# Altium PCB PCB2.PcbDoc
Units mil, origin at the board's own origin, x right, y up, seen from the top; angles counter-clockwise.
Board outline 1925 x 1700 mil, 2 copper layers (Top Layer, Bottom Layer); 20 components, 20 nets, 99 pads, 7 vias.
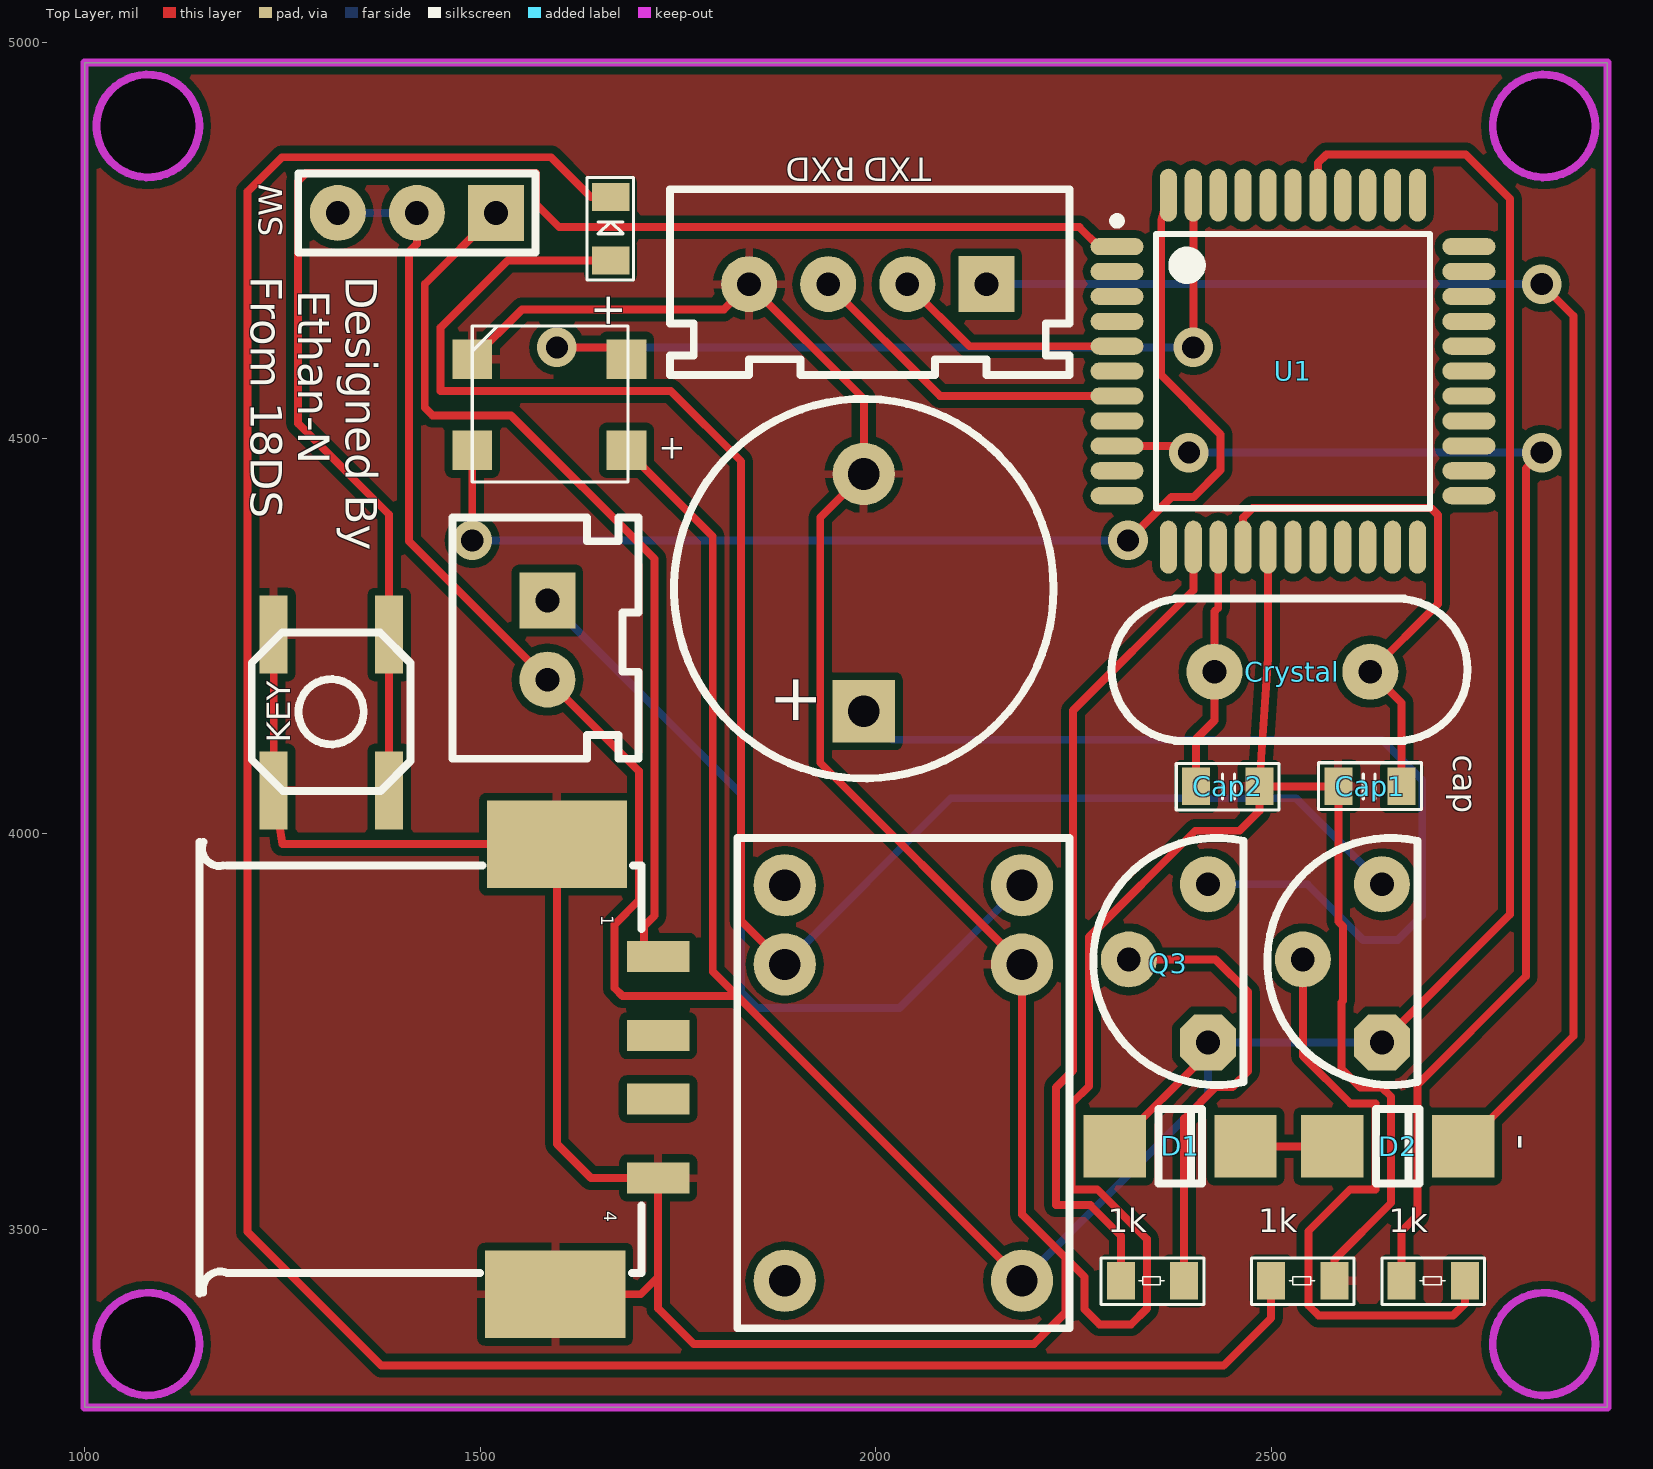
[diagram p0: Top Layer view]
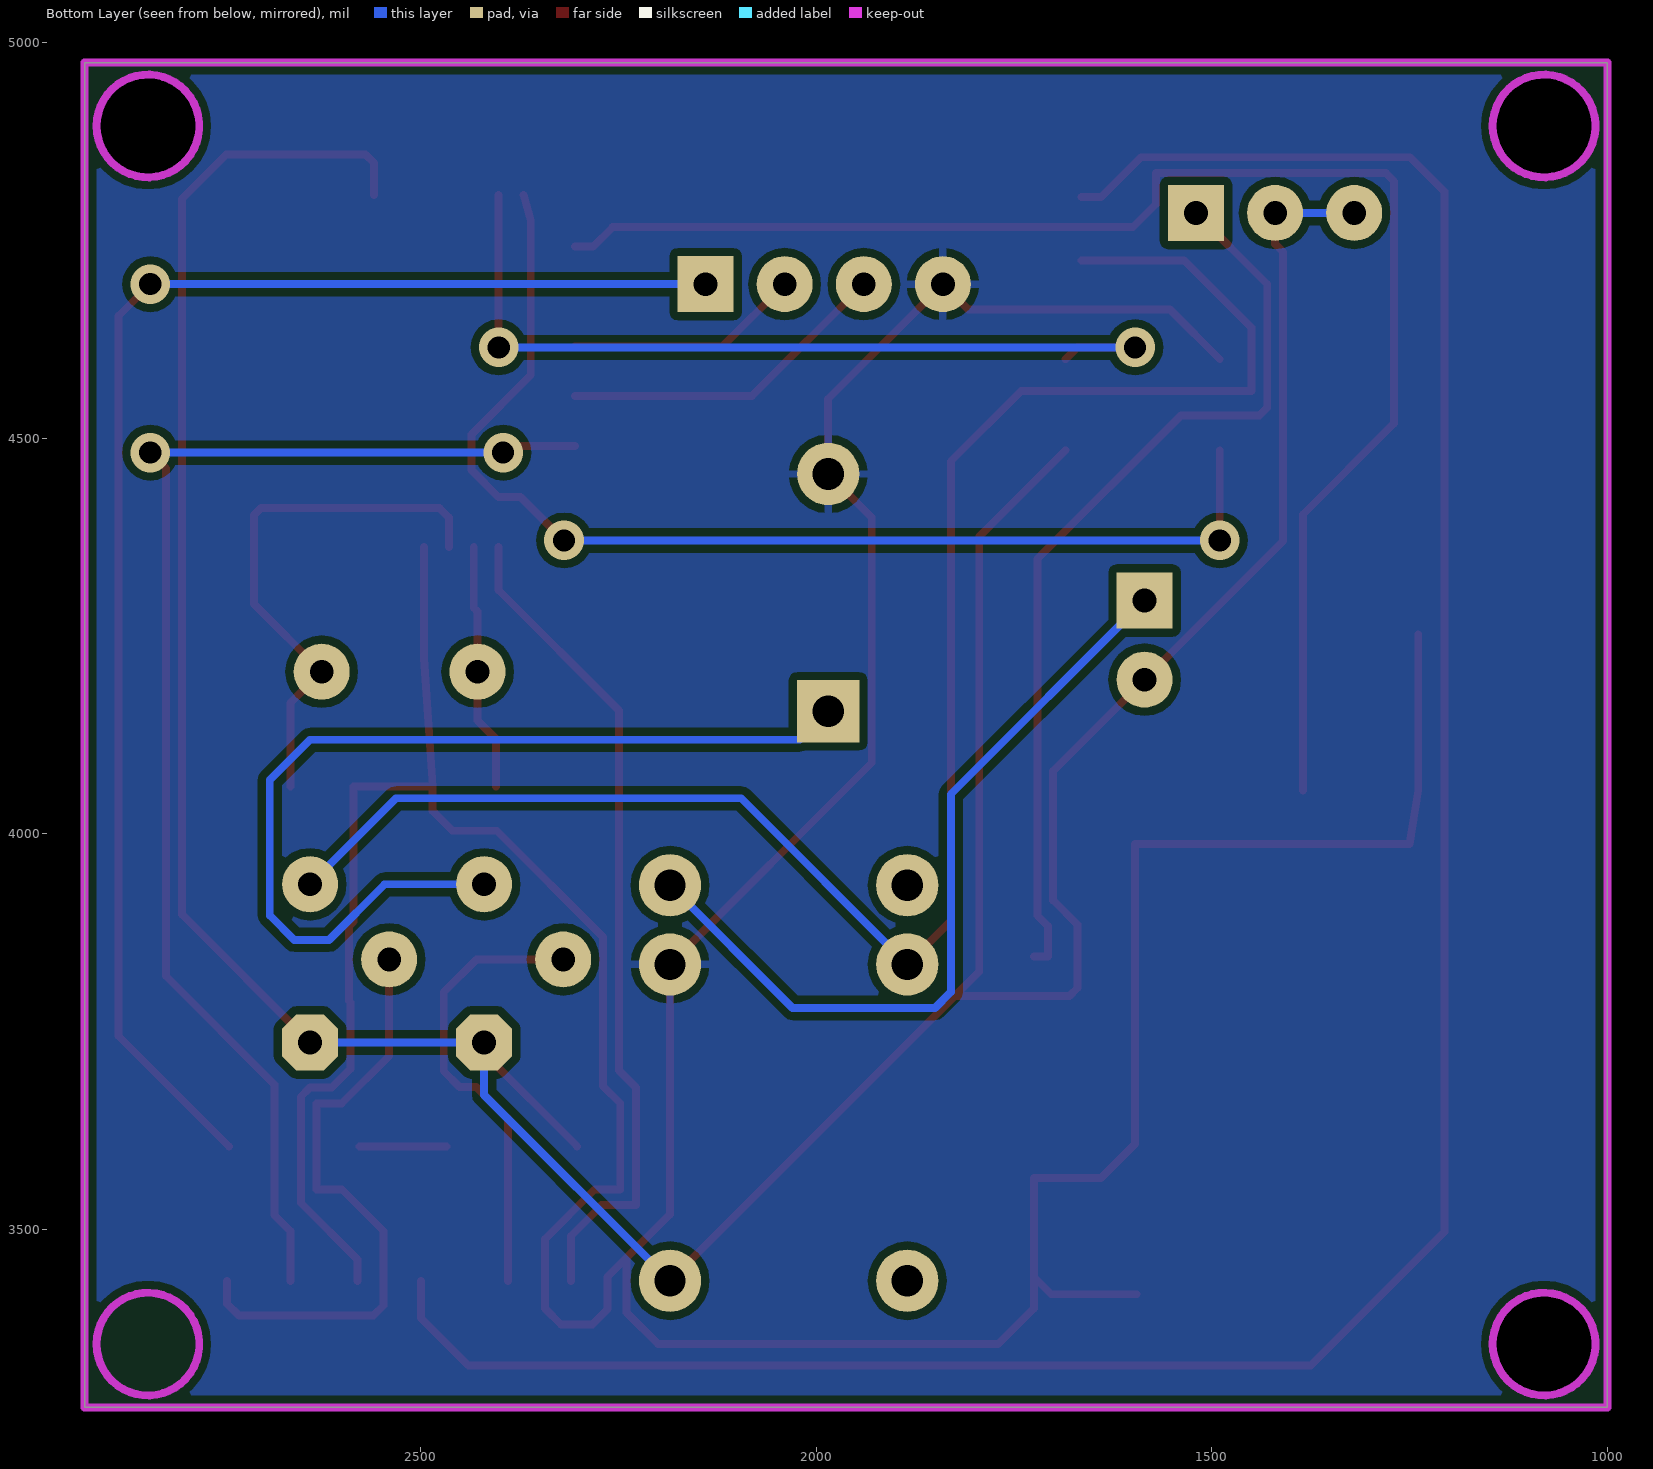
[diagram p1: Bottom Layer view, seen from below]

## Layer stack, top to bottom
Top Solder: solder mask 0.4, Solder Resist, Dk 3.5
Top Layer: signal copper 1.4
Dielectric 1: dielectric 12.6, FR-4, Dk 4.8
Bottom Layer: signal copper 1.4
Bottom Solder: solder mask 0.4, Solder Resist, Dk 3.5

## Board outline
1000,3275 1000,4975 2925,4975 2925,3275
cut-out: 2845,4830.04 cw(c2845,4895) 2780.04,4895 cw(c2845,4895) 2845,4959.96 cw(c2845,4895) 2909.96,4895 cw(c2845,4895)
cut-out: 1080,3290.04 cw(c1080,3355) 1015.04,3355 cw(c1080,3355) 1080,3419.96 cw(c1080,3355) 1144.96,3355 cw(c1080,3355)
cut-out: 1080,4830.04 cw(c1080,4895) 1015.04,4895 cw(c1080,4895) 1080,4959.96 cw(c1080,4895) 1144.96,4895 cw(c1080,4895)

## Design rules (kind name [scope] priority, off if disabled: settings)
Clearance [All] p1: gap=10 ignorepadtopadclearanceinfootprint=FALSE except(0: Arc-Hole Track-Hole SMDPad-Hole THPad-Hole Via-Hole Fill-Hole Poly-Hole Region-Hole Text-Hole)
PolygonConnect [All] p1: connectstyle=Relief reliefconductorwidth=10 reliefentries=4 polygonreliefangle="90 Angle" airgapwidth=10
RoomDefinition AS608-small [InComponentClass('AS608-small')] p1: confinementstyle=ConfineIn formatcopy=TRUE lockcomponents=FALSE outline 0,0 2000,0 2000,1000 0,1000
RoutingVias [All] p1: holewidth=28 width=50 viastyle="Through Hole" minholewidth=28 minwidth=50 maxholewidth=28 maxwidth=50
SolderMaskExpansion [All] p1: expansion=4
Width [All] p1: maxlimit=10 minlimit=10 preferedwidth=10
30 further rules are at their usual default settings.

## Classes and differential pairs
component class AS608-small: 1k Cap1 Cap2 Crystal D1 D2 KEY Q1 Q2 Q3 R2 R? SW U1 U2 U3 U4 ""

## Components (designator, comment, footprint, x,y, rotation, side; value= is the part's Value field where it differs from the comment)
1k "1K" 0805R 2285,3405 r0 top (schematic designator R?)
1k "1K" 0805R 2640,3405 r0 top (schematic designator R2)
1k "1K" 0805R 2475,3405 r0 top (schematic designator R1)
Cap1 "30PF" 0805C 2690,4090 r180 top
Cap2 "30PF" 0805C 2380,4030 r0 top
Crystal "11.0592MHZ" XTAL 2625,4205 r180 top
D1 "1N4007" SMA(DO-214AC)_S3 2385,3605 r180 top
D2 "1N4007" SMA(DO-214AC)_S3 2660,3605 r180 top
D3 "LED-YELLOW" 0805D 1635,4830 r270 top
K "继电器HK4100F" HK4100F 2245,3375 r90 top
KEY "功能按键" SW5*5 1412,4054 r90 top (schematic designator KEY?)
Q1 "S8550" 三极管 2690.04,3676.3 r90 top
Q2 "蜂鸣器" 蜂鸣器 1985.35,4155.34 r90 top
Q3 "S8550" 三极管 2470.02,3676.3 r90 top
SW "双掷开关" SS12D07G5 1575,4840 r180 top
U1 "STC89CXX" LQFP44 2259.56,4320 r0 top
U2 "AS608" XH4P 2250,4820 r180 top
U3 "接线柱" XH2P 1460,4405 r270 top
U4 "USB-A" USB-A贴片 1145,3990 r270 top
U5 "RGB" WS2812RGB 1490,4445 r0 top

## Footprints (in the part's own frame and the unit in brackets; to place one, negate y for a bottom-side part, rotate by r counter-clockwise, add the part's x,y. Pads: shape width x height; smd on the part's side, far side on the other; paste and mask are expansions set on the pad)
0805C [mm]
  rect 0.9x1.2 smd: 1(2.667,0.762) 2(0.635,0.762)
  silkscreen extent 0,0 3.3,1.5
0805D [mm]
  rect 0.9x1.2 smd: 1(2.667,0.762) 2(0.635,0.762)
  silkscreen extent 0,0 3.3,1.5
0805R [mm]
  rect 0.9x1.2 smd: 1(2.667,0.762) 2(0.635,0.762)
  silkscreen extent 0,0 3.3,1.5
HK4100F [mm]
  round 2 hole 1: 1(1.524,9.144) 2(11.684,9.144) 3(14.224,9.144) 4(14.224,1.524) 5(11.684,1.524) 6(1.524,1.524)
  silkscreen extent 0,0 15.75,10.67
LQFP44 [mm]
  oval 1.7x0.55 smd: 1(1.157,10.731) 2(1.157,9.931) 3(1.157,9.131) 4(1.157,8.331) 5(1.157,7.531) 6(1.157,6.731) 7(1.157,5.931) 8(1.157,5.131) 9(1.157,4.331) 10(1.157,3.531) 11(1.157,2.731) 23(12.457,2.731) 24(12.457,3.531) 25(12.457,4.331) 26(12.457,5.131) 27(12.457,5.931) 28(12.457,6.731) 29(12.457,7.531) 30(12.457,8.331) 31(12.457,9.131) 32(12.457,9.931) 33(12.457,10.731)
  oval 0.55x1.7 smd: 12(2.807,1.081) 13(3.607,1.081) 14(4.407,1.081) 15(5.207,1.081) 16(6.007,1.081) 17(6.807,1.081) 18(7.607,1.081) 19(8.407,1.081) 20(9.207,1.081) 21(10.007,1.081) 22(10.807,1.081) 34(10.807,12.381) 35(10.007,12.381) 36(9.207,12.381) 37(8.407,12.381) 38(7.607,12.381) 39(6.807,12.381) 40(6.007,12.381) 41(5.207,12.381) 42(4.407,12.381) 43(3.607,12.381) 44(2.807,12.381)
  silkscreen extent 1.03,2.33 11.21,11.68, body extent 1.81,1.73 11.81,11.73, height 1.2
SMA(DO-214AC)_S3 [mm]
  rect 2x2 smd: 1(2.1,0) 2(-2.1,0)
  silkscreen extent -0.7,-1.2 0.7,1.2
SS12D07G5 [mil]
  rect 70.87x70.87 hole 30: 1(55,55)
  round 70.87 hole 30: 2(155,55) 2(255,55)
  silkscreen extent 5,5 305,105
SW5*5 [mil]
  rect 98.43x35.43 smd: 1(1,173) 1(198,173) 2(1,27) 2(198,27)
  silkscreen extent 0,0 201,201
USB-A贴片 [mm]
  rect 1x2 smd: 1(3.683,14.732) 2(6.223,14.732) 3(8.255,14.732) 4(10.795,14.732)
  rect 2.8x4.5 smd: 5(0.076,11.481) 5(14.529,11.43)
  silkscreen extent 0,0 14.5,14.2
WS2812RGB [mil]
  rect 50x50 smd: 1(0,155) 2(0,40) 3(195,40) 4(195,155)
  silkscreen extent 0,0 197,197
XH2P [mil]
  rect 70.87x70.87 hole 30: 1(110,125)
  round 70.87 hole 30: 2(210,125)
  silkscreen extent 5,5 310,240
XH4P [mil]
  rect 70.87x70.87 hole 30: 1(110,125)
  round 70.87 hole 30: 2(210,125) 3(310,125) 4(410,125)
  silkscreen extent 5,5 510,240
XTAL [mm]
  round 1.8 hole 0.76: 1(-0.008,-0.001) 2(4.996,-0.001)
  silkscreen extent -3.13,-2.35 8.3,2.22
三极管 [mil]
  oct 70.87x70.87 hole 30: 1(60,50)
  round 70.87 hole 30: 2(165,150) 3(260,50)
  silkscreen extent 6,5 319,195
蜂鸣器 [mm]
  rect 2x2 hole 1.016: 1(-0.009,0.009)
  round 2 hole 1.016: 2(7.611,0.009)
  silkscreen extent -2.17,-6.09 10.02,6.1

## Part data
1k 1k 1k: library part RES
Cap1 Cap2: library part 瓷片电容
Crystal: library part XTAL
KEY: library part 微动开关
U5: library part WS2812RGB

## Via types
v1: diameter 50, hole 28, Top Layer to Bottom Layer, 7 vias

## Nets (pads, with @x,y where several pads share a name; then routed paths per layer and width w, separated by ;. In a path a pad name is that pad's centre, name@x,y a point inside that pad or via, vN(x,y) a via of type N, cw(c..) or ccw(c..) an arc to the next point about the centre after c; other vN are vias at no path point)
GND: 1k.1@2580,3435 Cap1.1 Cap2.1 K.5 KEY.1 Q2.2 U1.16 U2.4 U4.4 U4.5 U5.1 | length 6014.8
  Top Layer w10: KEY.1@1239,4252 1239,4055 1250,3987 1597,3987 1597,3608 1640,3565 U4.4 1725,3440 ; U5.1 1553.04,4663.04 1808.04,4663.04 U2.4 1985,4550 Q2.2 1930,4400 1930,4090 K.5 2185,3519 2240,3464 ; U4.5@1595,3418 1703,3418 1725,3440 ; U1.16 2496.06,4222.06 Cap2.1 ; 1k.1@2580,3435 2580,3462 2651.69,3533.69 2651.69,3667.68 2640,3679.37 2612.63,3679.37 2589,3703 2589,3787 2591,3789 2591,3883 2585,3889 Cap1.1 Cap2.1 ; 1725,3440 1725,3400 1770,3355 2200,3355 2240,3395 2240,3464 ; 2240,3464 2264,3440 2264,3399 2283,3380 2323,3380 2343,3400 2343,3487.63 2280,3550.63 2247.95,3550.63 2247.95,3659.37 2269.59,3681.01 2269.59,3869.59 2404,4004 2460,4004 2485,4029 Cap2.1
NetCap1_2: Cap1.2 Crystal.1 U1.15 | length 687.5
  Top Layer w10: U1.15 2464.57,4400 2476.57,4412 2702,4412 2711,4403 2711,4290.71 Crystal.1 2665,4165.34 Cap1.2
NetCap2_2: Cap2.2 Crystal.2 U1.14 | length 314.2
  Top Layer w10: Cap2.2 2405,4120 2428.32,4143.32 Crystal.2 2428.32,4281 2433.07,4285.75 U1.14
NetD1_2: D1.2 D2.1 | length 109.6
  Top Layer w10: D1.2 D2.1
NetD2_2: D2.2 U2.1 | length 1866.3
  Top Layer w10: D2.2 2882,3744.32 2882,4655 v1(2842,4695)
  Bottom Layer w10: U2.1 v1(2842,4695)
NetD3_1: D3.1 K.2 Q1.3 | length 2292.9
  Top Layer w10: D3.1 1535,4725 1450,4640 1450,4560 1741,4560 1830,4471 1830,3890 K.2
  Bottom Layer w10: K.2 2095,4045 2531.34,4045 Q1.3
NetD3_2: 1k.2@2500,3435 D3.2 | length 3248.7
  Top Layer w10: D3.2 1640,4805 1589.57,4855.43 1249.57,4855.43 1206,4811.87 1206,3497 1375,3328 2440,3328 2500,3388 1k.2@2500,3435
NetK_4: K.4 U3.1 | length 1024
  Bottom Layer w10: U3.1 1830,4050 1830,3800 1850,3780 2030,3780 K.4
NetKEY?_2: KEY.2 U1.1 | length 1919
  Top Layer w10: KEY.2@1385,4055 1385,4252 1385,4403.57 1269.57,4519 1269.57,4825 1280,4835.43 1570.43,4835.43 1570.43,4796.57 1600,4767 2257.48,4767 2282,4742.48 U1.1
NetQ1_2: 1k.1@2745,3435 Q1.2 | length 786.1
  Top Layer w10: Q1.2 2540.04,3719.33 2600,3659.37 2631.69,3659.37 2631.69,3550.63 2600,3550.63 2547,3497.63 2547,3404 2560,3391 2730,3391 2745,3406 1k.1@2745,3435
NetQ2_1: Q2.1 Q3.3 | length 1226
  Bottom Layer w10: Q2.1 2021,4119 2640,4119 2691,4068 2691,3897 2660,3866 2616,3866 2545.7,3936.3 Q3.3
NetQ3_2: 1k.1@2390,3435 Q3.2 | length 578.9
  Top Layer w10: Q3.2 2429.7,3841.3 2471,3800 2471,3700 2451,3680 2430,3680 2390,3640 1k.1@2390,3435
NetR2_2: 1k.2@2665,3435 U1.9 | length 1660.7
  Top Layer w10: U1.9 2387.49,4490.51 v1(2396,4482) ; 1k.2@2665,3435 2665,3498 2685,3518 2685,3683 2822,3820 2822,4462 v1(2842,4482)
  Bottom Layer w10: v1(2396,4482) v1(2842,4482)
NetR?_2: 1k.2@2310,3435 U1.13 | length 1058.9
  Top Layer w10: 1k.2@2310,3435 2310,3492 2271.37,3530.63 2227.95,3530.63 2227.95,3679.37 2249.59,3701.01 2249.59,4156.01 2401.57,4308 U1.13
NetSW_1: SW.1 U4.1 | length 1179.3
  Top Layer w10: SW.1 1430,4695 1430,4538.97 1440,4528.97 1539.03,4528.97 1720.58,4347.42 1720.58,3896.88 1707,3883.3 1707,3845 U4.1
NetU1_5: U1.5 U2.2 | length 297.6
  Top Layer w10: U2.2 2118.5,4616.5 U1.5
NetU1_7: U1.7 U2.3 | length 423.7
  Top Layer w10: U2.3 2081.5,4553.5 U1.7
NetU1_43: U1.43 U5.4 | length 1091.2
  Top Layer w10: v1(1597,4615) 1670,4615 U5.4 ; v1(2401.57,4615) U1.43
  Bottom Layer w10: v1(1597,4615) v1(2401.57,4615)
NetU1_44: U1.44 U5.2 | length 1476.7
  Top Layer w10: v1(1490,4371) U5.2 ; v1(2319,4371) 2374,4426 2402,4426 2436,4460 2436,4505 2361,4580 2361,4775.92 U1.44
  Bottom Layer w10: v1(1490,4371) v1(2319,4371)
VCC: D1.1 K.6 Q1.1 Q3.1 SW.2 U1.38 U3.2 U5.3 | length 4877.2
  Top Layer w10: SW.2@1420,4785 1420,4746 1410,4736 1410,4370 U3.2 1700.58,4079.42 1700.58,3916 1670,3885.42 1670,3805 1680,3795 1825,3795 ; U5.3 1794,4376 1794,3826 1825,3795 ; K.6 1825,3795 ; D1.1 2420.02,3722.7 Q3.1 ; U1.38 2559.06,4848.06 2570,4859 2746,4859 2802,4803 2802,3898.26 Q1.1
  Bottom Layer w10: SW.2@1320,4785 SW.2@1420,4785 ; K.6 2420.02,3670.02 Q3.1 Q1.1
pads on no net: K.1 K.3 U1.2 U1.3 U1.4 U1.6 U1.8 U1.10 U1.11 U1.12 U1.17 U1.18 U1.19 U1.20 U1.21 U1.22 U1.23 U1.24 U1.25 U1.26 U1.27 U1.28 U1.29 U1.30 U1.31 U1.32 U1.33 U1.34 U1.35 U1.36 U1.37 U1.39 U1.40 U1.41 U1.42 U4.2 U4.3

## Polygon pours and split planes (outlines as drawn)
GND on Top Layer "Top Layer-No Net" (solid, pour order 4): 1000,4975 1000,3275 2925,3275 2925,4975
GND on Bottom Layer "Top Layer-No Net" (solid, pour order 6): 1000,4975 1000,3275 2925,3275 2925,4975

## Keep-outs
Keep-Out Layer:
  circle w10: c2845,4895 r64.96
  circle w10: c2845,3355 r64.96
  circle w10: c1080,3355 r64.96
  circle w10: c1080,4895 r64.96
  pour cut-out: 2845,3290.04 cw(c2845,3355) 2780.04,3355 cw(c2845,3355) 2845,3419.96 cw(c2845,3355) 2909.96,3355 cw(c2845,3355)
  lines w10: 1000,3275 2925,3275 2925,4975 1000,4975 1000,3275

## Silkscreen, mask and mechanical layers (free items; w line width, h text height)
Top Overlay:
  text "RXD" at 1975,4855 h30 r180
  text "TXD" at 2070,4855 h30 r180
  text "Designed By /  Ethan-N / From 18DS" at 1210,4705 h40 r270
  text "+" at 1645,4685 h40 r270
  text "+" at 1760,4500 h30 r180
  text "cap" at 2730,4100 h30 r270
  text "-" at 2800,3620 h40 r270

## Text inside footprints (layer, text, board x,y; h text height)
Q2: Top Overlay "+" at 1925,4135 h60 r90
U4: Top Overlay "4" at 1656.73,3523.19 h15.75 r270; Top Overlay "1" at 1653.19,3897.2 h15.75 r270